# Altium PCB PCB1.PcbDoc
Units mm, origin at the board's own origin, x right, y up, seen from the top; angles counter-clockwise.
Board outline 95 x 95 mm, 2 copper layers (Top Layer, Bottom Layer); 46 components, 34 nets, 169 pads, 35 vias.
Unrouted connection lines stored in the file: 1.
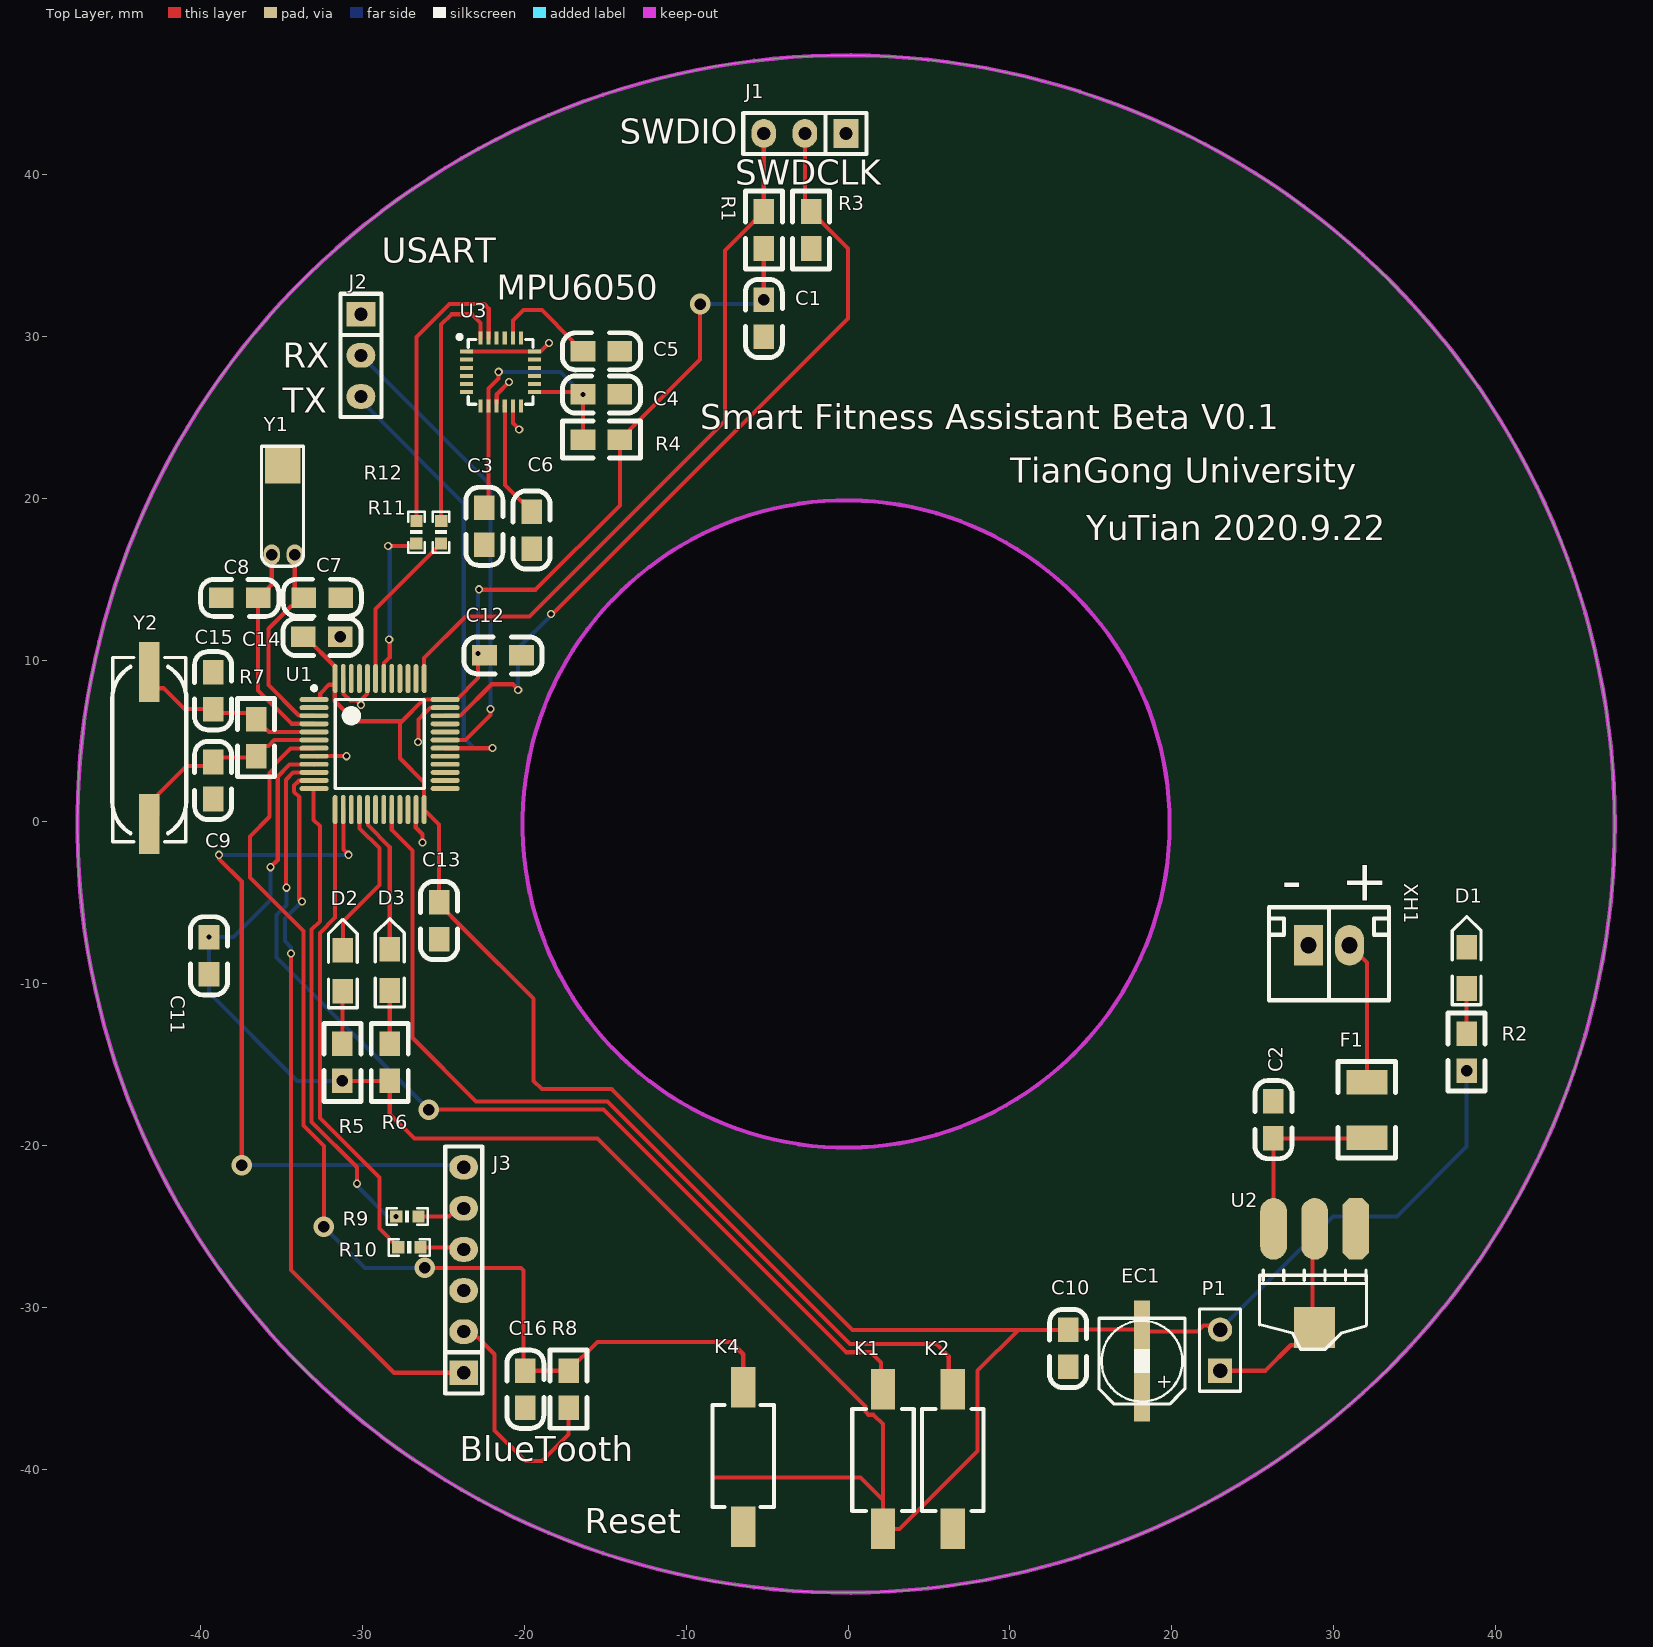
[diagram p0: Top Layer view]
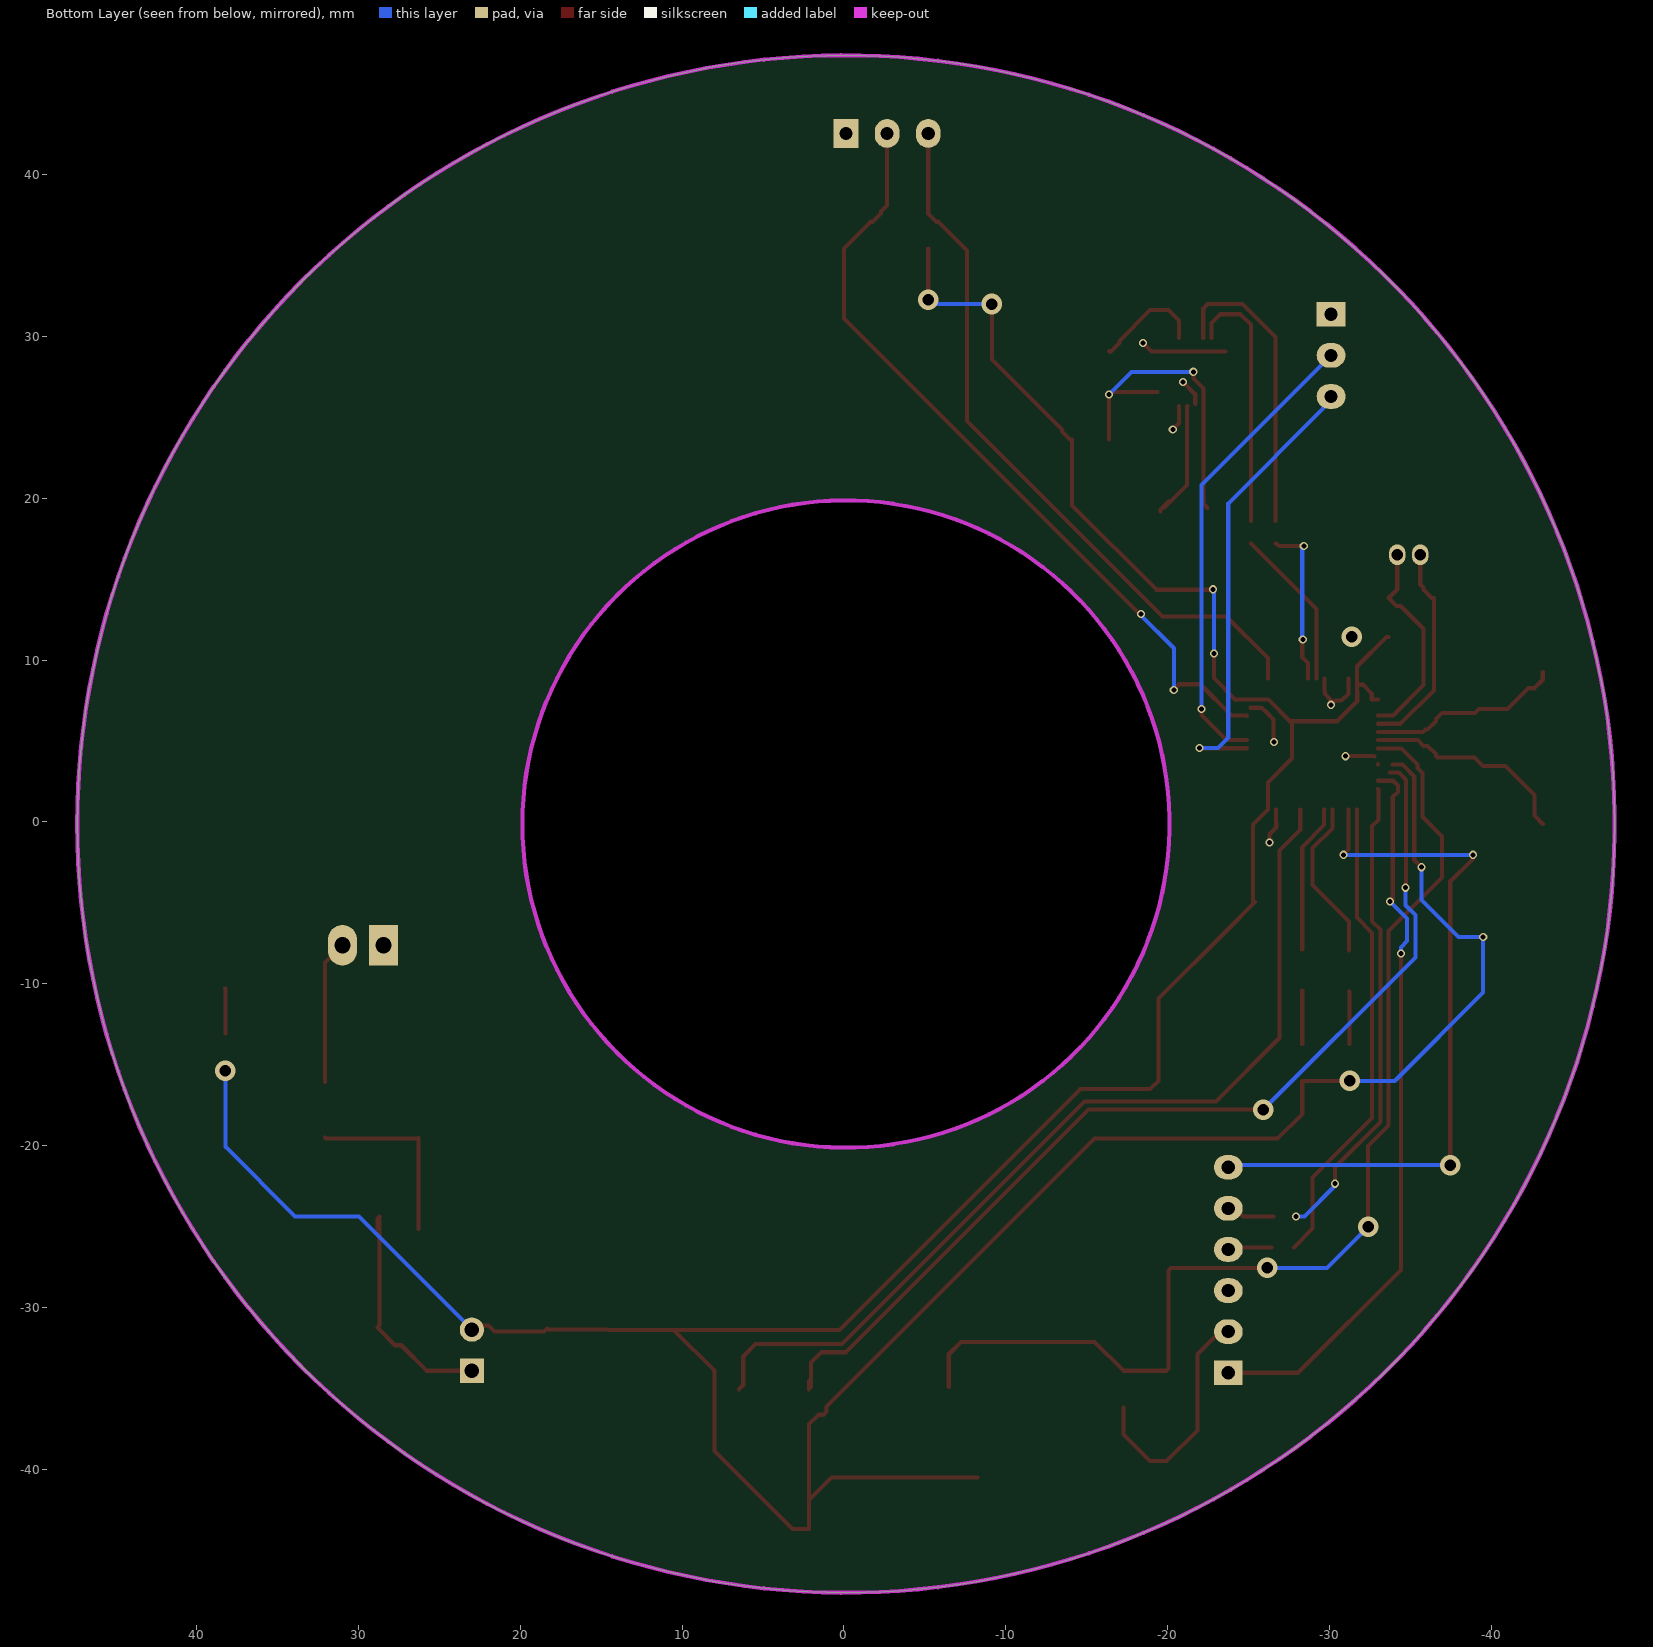
[diagram p1: Bottom Layer view, seen from below]
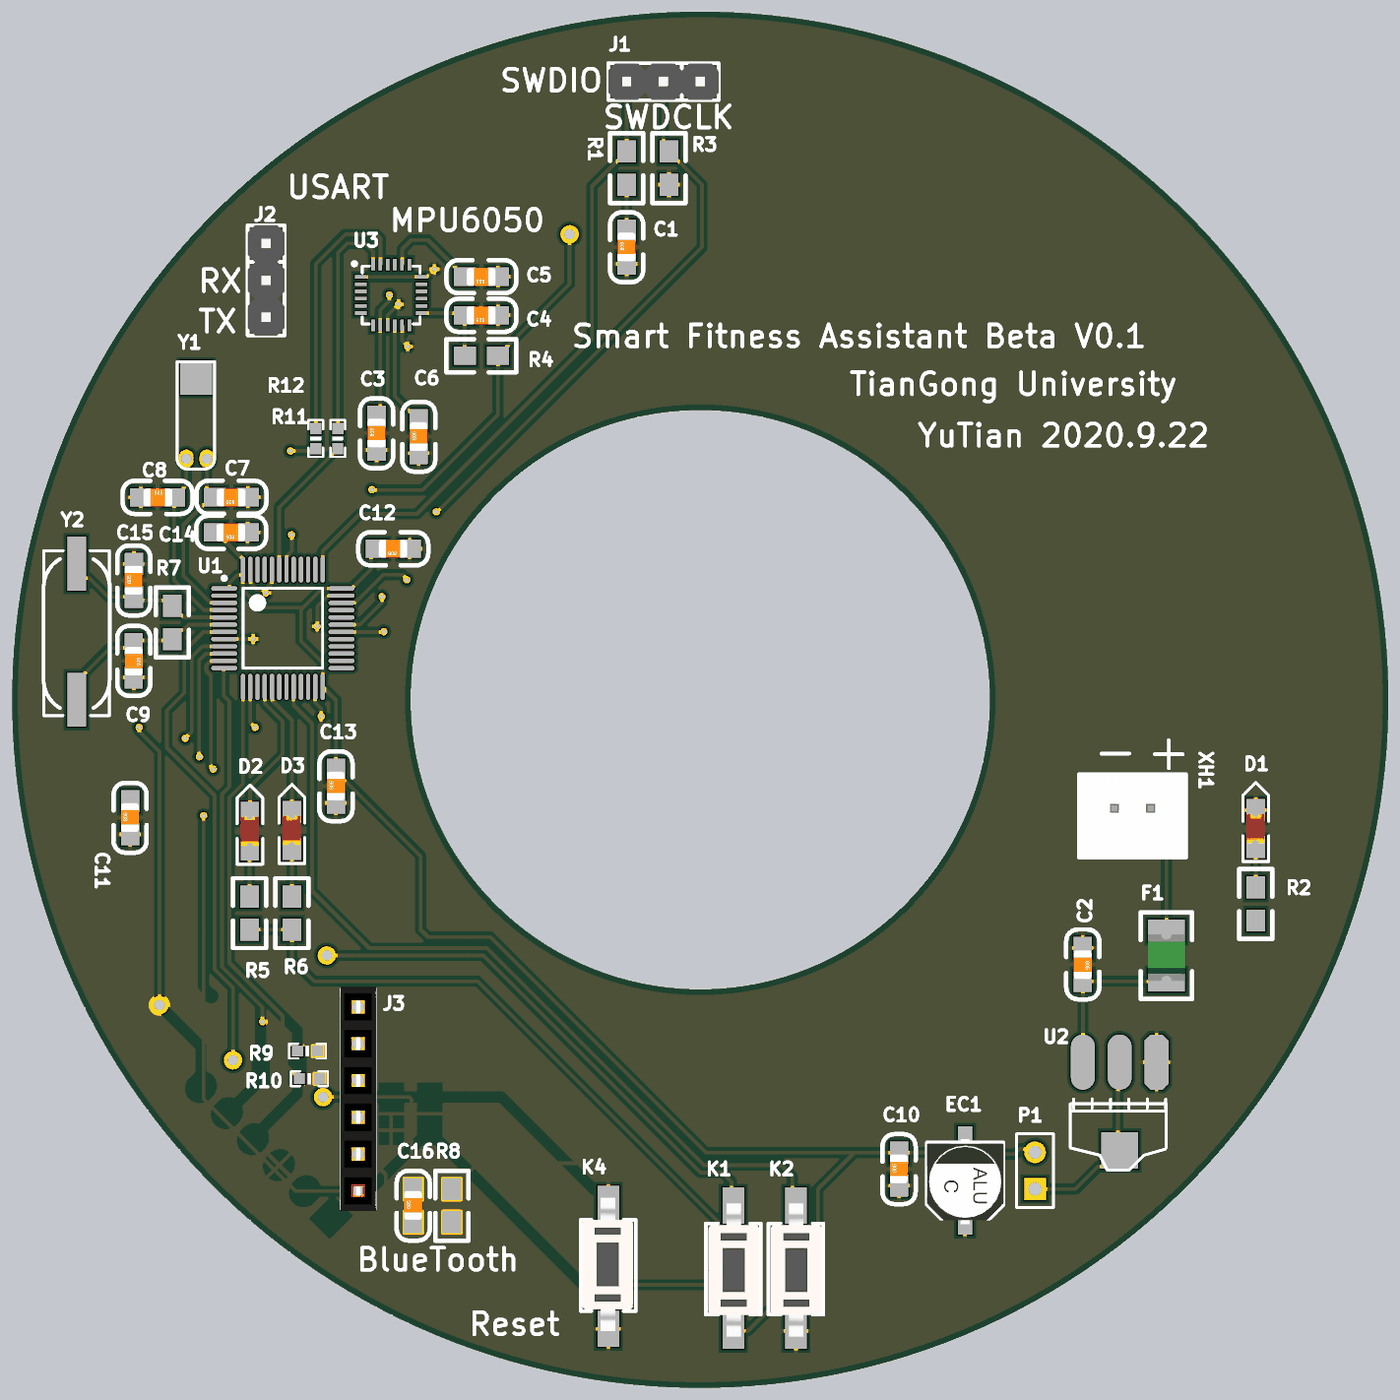
[diagram p2: 3D render of the assembled board from above, using the file's embedded part models]

## Layer stack, top to bottom
Top Solder: solder mask 0.0102, Solder Resist, Dk 3.5
Top Layer: signal copper 0.0356
Dielectric 1: dielectric 0.32, FR-4, Dk 4.8
Bottom Layer: signal copper 0.0356
Bottom Solder: solder mask 0.0102, Solder Resist, Dk 3.5

## Board outline
-47.627,-0.127 ccw(c-0.127,-0.127) -0.127,-47.627 ccw(c-0.127,-0.127) 47.373,-0.127 ccw(c-0.127,-0.127) -0.127,47.373 ccw(c-0.127,-0.127)
cut-out: -20.127,-0.127 ccw(c-0.127,-0.127) -0.127,-20.127 ccw(c-0.127,-0.127) 19.873,-0.127 ccw(c-0.127,-0.127) -0.127,19.873 ccw(c-0.127,-0.127)

## Design rules (kind name [scope] priority, off if disabled: settings)
Clearance [All] p1: gap=0.254 ignorepadtopadclearanceinfootprint=TRUE except(0: Arc-Hole Track-Hole SMDPad-Hole THPad-Hole Via-Hole Fill-Hole Poly-Hole Region-Hole Text-Hole; 0.203: Arc-SMDPad Track-SMDPad)
DiffPairsRouting [All] p1: maxlimit=0.254 minlimit=0.254 mostfreqgap=0.254 toplayer_minwidth=0.203 toplayer_maxwidth=0.381 toplayer_prefwidth=0.203 bottomlayer_minwidth=0.203 bottomlayer_maxwidth=0.381 bottomlayer_prefwidth=0.203 maxuncoupledlength=12.7
PolygonConnect [All] p1: connectstyle=Relief reliefconductorwidth=0.254 reliefentries=4 polygonreliefangle="90 Angle" airgapwidth=0.254
RoutingVias [All] p1: holewidth=0.305 width=0.508 viastyle="Through Hole" minholewidth=0.203 minwidth=0.508 maxholewidth=0.508 maxwidth=1.27
SolderMaskExpansion [All] p1: expansion=0.102 istentingtop=FALSE
Width [All] p1: maxlimit=0.254 minlimit=0.178 preferedwidth=0.203
29 further rules are at their usual default settings.

## Components (designator, comment, footprint, x,y, rotation, side; value= is the part's Value field where it differs from the comment)
C1 "104" 0805C -5.217,29.99 r90 top
C2 "104" 0805C 26.289,-17.272 r270 top
C3 "10u" 0805C -22.479,17.145 r90 top
C4 "104" 0805C -14.115,26.406 r180 top
C5 "10u" 0805C -14.115,29.073 r180 top
C6 "104" 0805C -19.568,16.909 r90 top
C7 "10P" 0805C -31.369,13.843 r180 top
C8 "10P" 0805C -38.717,13.853 r0 top
C9 "22P" 0805C -39.226,3.683 r270 top
C10 "104" 0805C 13.589,-33.655 r90 top
C11 "104" 0805C -39.497,-9.398 r90 top
C12 "104" 0805C -20.193,10.287 r180 top
C13 "104" 0805C -25.283,-7.221 r90 top
C14 "104" 0805C -31.387,11.42 r180 top
C15 "22P" 0805C -39.243,6.985 r90 top
C16 "104" 0805C -19.949,-36.177 r90 top
D1 "LED" LED-0805R 38.227,-10.287 r90 top
D2 "LED" LED-0805R -31.214,-10.467 r90 top
D3 "LED" LED-0805R -28.321,-10.414 r90 top
EC1 "220u" SMD-EC5.0X5.3X5.4 18.161,-35.56 r90 top
F1 "0.75A" FUSE-1210 32.004,-16.129 r270 top
J1 "SWD Port" "Pin HDR1X3/2.54mm-S" -0.127,42.545 r270 top
J2 "USART_PORT" "Pin HDR1X3/2.54mm-S" -30.099,31.369 r0 top
J3 "HC-06 Interface" Fe-HDR1X6/2.54-S -23.749,-34.036 r90 top
K1 "KEY" SMD-3X6X4.3 2.159,-43.688 r90 top
K2 "KEY" SMD-3X6X4.3 6.477,-43.688 r90 top
K4 "KEY" SMD-3X6X4.3 -6.477,-34.925 r270 top
P1 "Header 2" HDR1X2 22.987,-33.909 r90 top
R1 "10K" 0805 -5.205,37.719 r270 top
R2 "510R" 0805 38.227,-13.081 r270 top
R3 "10K" 0805 -2.288,35.433 r90 top
R4 "10R" 0805 -16.383,23.624 r0 top
R5 "510R" 0805 -31.24,-13.716 r270 top
R6 "510R" 0805 -28.319,-13.716 r270 top
R7 "1M" 0805 -36.576,6.35 r270 top
R8 "10K" 0805 -17.27,-33.909 r270 top
R9 "0R" 0603P -27.241,-24.382 r0 top
R10 "0R" 0603P -27.114,-26.287 r0 top
R11 "0R" 0603P -26.67,17.907 r270 top
R12 "0R" 0603P -25.146,17.907 r270 top
U1 "STM32F103C8T6" STM-LQFP48_N -28.944,4.812 r0 top
U2 "AMS1117" AMS1117 31.37,-25.148 r180 top
U3 "MPU6050" QFN24 -21.463,27.813 r0 top
XH1 "XH2" XH2/2.54mm/180 28.448,-7.62 r0 top
Y1 "XATL32" XTAL32 -35.611,16.51 r90 top
Y2 "8M" 49S_SMD -43.18,9.271 r270 top

## Footprints (in the part's own frame and the unit in brackets; to place one, negate y for a bottom-side part, rotate by r counter-clockwise, add the part's x,y. Pads: shape width x height; smd on the part's side, far side on the other; paste and mask are expansions set on the pad)
49S_SMD [mil]
  rect 146x51 smd: 1(0,0) 2(370,0)
  silkscreen extent -35,-90 413,90
0603P [mil]
  rect 30x30 smd: 1(-27,0) 2(27.5,-0.06)
  silkscreen extent -50,-20 50,20
0805 [mil]
  rect 60x50 smd: 1(0,-0.06) 2(90,-0.06)
  silkscreen extent -50,-45 140,45
0805C [mil]
  rect 60x50 smd: 1(-0.71,-0.4) 2(89.29,-0.4)
  silkscreen extent -51,-45 139,45, body extent 6,-25 84,25, height 31
AMS1117 [mil]
  oct 65x150 smd: 1(0.03,-0.06)
  oval 65x150 smd: 2(100.03,-0.06) 3(200.03,-0.06)
  rect 100x100 smd: 4(100.03,239.94)
  silkscreen extent -26,100 234,293
Fe-HDR1X6/2.54-S [mil]
  rect 60x70 hole 32: 1(0,0)
  oval 60x70 hole 32: 2(100,0) 3(200,0) 4(300,0) 5(400,0) 6(500,0)
  silkscreen extent -50,-45 550,45, body extent -55,-49 555,49, height 109
FUSE-1210 [mil]
  rect 60x100 smd: 1(-2,2) 2(133,2)
  silkscreen extent -52,-68 183,72, body extent 8,-49 134,53, height 27
HDR1X2 [mm]
  rect 1.5x1.5 hole 0.9: 1(0,0)
  round 1.5 hole 0.9: 2(2.54,0)
  silkscreen extent -1.27,-1.27 3.81,1.27
LED-0805R [mil]
  rect 60x50 smd: A(0,0) K(100,0)
  silkscreen extent -40,-35 175,35, body extent 11,-24 89,25, height 32
"Pin HDR1X3/2.54mm-S" [mil]
  rect 70x60 hole 32: 1(0,0)
  oval 70x60 hole 32: 2(0,-100) 3(0,-200)
  silkscreen extent -50,-250 50,50, body extent -50,-250 50,50, height 336
QFN24 [mm]
  rect 0.8x0.25 smd: 1(-2.101,1.25) 2(-2.101,0.75) 3(-2.101,0.25) 4(-2.101,-0.25) 5(-2.101,-0.75) 6(-2.101,-1.25) 13(2.101,-1.25) 14(2.101,-0.75) 15(2.101,-0.25) 16(2.101,0.25) 17(2.101,0.75) 18(2.101,1.25)
  rect 0.25x0.8 smd: 7(-1.25,-2.101) 8(-0.75,-2.101) 9(-0.25,-2.101) 10(0.25,-2.101) 11(0.75,-2.101) 12(1.25,-2.101) 19(1.25,2.101) 20(0.75,2.101) 21(0.25,2.101) 22(-0.25,2.101) 23(-0.75,2.101) 24(-1.25,2.101)
  silkscreen extent -2.66,-2 2,2.28
SMD-3X6X4.3 [mm]
  rect 2.5x1.5 smd: 1(0,0) 3(8.636,0)
  silkscreen extent 1.11,-1.9 7.41,1.9, body extent -0.41,-1.78 8.79,1.72, height 4.4
SMD-EC5.0X5.3X5.4 [mm]
  rect 3x1 smd: 1(0,0) 2(4.477,0)
  silkscreen extent -0.41,-2.65 4.89,2.66, body extent -0.79,-2.65 5.11,2.65, height 5.41
STM-LQFP48_N [mm] "QFP, 48-Leads, Body 7x7mm, Pitch 0.5mm, IPC Medium Density"
  oval 1.8x0.3 smd: 1(-4.05,2.75) 2(-4.05,2.25) 3(-4.05,1.75) 4(-4.05,1.25) 5(-4.05,0.75) 6(-4.05,0.25) 7(-4.05,-0.25) 8(-4.05,-0.75) 9(-4.05,-1.25) 10(-4.05,-1.75) 11(-4.05,-2.25) 12(-4.05,-2.75) 25(4.05,-2.75) 26(4.05,-2.25) 27(4.05,-1.75) 28(4.05,-1.25) 29(4.05,-0.75) 30(4.05,-0.25) 31(4.05,0.25) 32(4.05,0.75) 33(4.05,1.25) 34(4.05,1.75) 35(4.05,2.25) 36(4.05,2.75)
  oval 0.3x1.8 smd: 13(-2.75,-4.05) 14(-2.25,-4.05) 15(-1.75,-4.05) 16(-1.25,-4.05) 17(-0.75,-4.05) 18(-0.25,-4.05) 19(0.25,-4.05) 20(0.75,-4.05) 21(1.25,-4.05) 22(1.75,-4.05) 23(2.25,-4.05) 24(2.75,-4.05) 37(2.75,4.05) 38(2.25,4.05) 39(1.75,4.05) 40(1.25,4.05) 41(0.75,4.05) 42(0.25,4.05) 43(-0.25,4.05) 44(-0.75,4.05) 45(-1.25,4.05) 46(-1.75,4.05) 47(-2.25,4.05) 48(-2.75,4.05)
  silkscreen extent -4.17,-2.75 2.75,3.57, body extent -3.5,-3.5 3.5,3.5, height 1.6
XH2/2.54mm/180 [mm]
  rect 1.8x2.5 hole 1: 1(0,0)
  oval 1.8x2.5 hole 1: 2(2.54,0)
  silkscreen extent -2.43,-3.4 4.97,2.35, body extent -2.43,-3.4 4.97,2.35, height 7
XTAL32 [mil]
  oval 50x40 hole 28: 1(0,0) 2(0,-56)
  rect 92.13x86 smd: ""(220,-27)
  silkscreen extent -28,-77 264,25

## Part data
C1 C2 C3 C4 C5 C6 C7 C8 C9 C10 C11 C12 C13 C14 C15 C16: library part CAP, "无极性电容"
EC1: library part SMD_ECAP, "贴片电解电容"
F1: library part FUSE
J1 J2: library part "Pin HDR1X3"
J3: library part "Female HDR1X6"
P1: "Header, 2-Pin"
R1 R2 R3 R4 R5 R6 R7 R8 R9 R10 R11 R12: library part R
U1: "ARM Cortex-M3 32-bit MCU, 64 KB Flash, 20 KB Internal RAM, 37 I/Os, 48-pin LQFP, -40 to 85 degC, Tray", I/Os (High Current)=37, Operating Frequency(F) (Processor speed) (MHz)=72, Supplier Part Number 1=497-6063-ND, Supply Voltage(Vcc) min (V)=2, A/D Converter="2x12-bit (10 Channel)", ComponentLink1Description="Manufacturer URL", ComponentLink1URL=http://www.st.com/web/en/home.html, ComponentLink2Description=Datasheet, ComponentLink2URL=http://www.st.com/st-web-ui/static/active/en/resource/technical/document/datasheet/CD00161566.pdf, ComponentLink3Description="Package Specification", ComponentLink3URL=http://www.st.com/st-web-ui/static/active/en/resource/technical/document/datasheet/DM00058181.pdf, Core="ARM Cortex-M3", DatasheetVersion="Rev. 16", FLASH Size (Prog) (kB)=64, Internal RAM Size (kB)=20, Mounting Technology="Surface Mount", PackageDescription="48-Pin Low Profile Quad Flat Package, 7 x 7 mm Body, 0.5 mm Pitch", PackageReference=LQFP48, PackageVersion="Rev. 6, 06/2013", Packing=Tray, PartNumber=STM32F103C8T6, Supplier 1=Digi-Key, Supplier 2=Farnell, Supplier 3=Newark, Supplier 4=Newark, Supplier 5=Mouser, Supplier Part Number 2=1447637, Supplier Part Number 3=59M2182, Supplier Part Number 4=57P1222, Supplier Part Number 5=511-STM32F103C8T6
U3: "9轴运动处理传感器"
Y1: library part XTAL_1, "Crystal Oscillator"
Y2: library part XTAL, "Crystal Oscillator"

## Via types
v1: diameter 0.508, hole 0.305, Top Layer to Bottom Layer, 26 vias
v2: diameter 1.27, hole 0.711, Top Layer to Bottom Layer, 9 vias

## Nets (pads, with @x,y where several pads share a name; then routed paths per layer and width w, separated by ;. In a path a pad name is that pad's centre, name@x,y a point inside that pad or via, vN(x,y) a via of type N, cw(c..) or ccw(c..) an arc to the next point about the centre after c; other vN are vias at no path point)
3V3: C1.2 C10.2 C11.2 C12.2 C13.2 C14.2 EC1.2 J3.2 K1.1 P1.2 R1.2 R2.2 R4.2 R5.2 R6.2 R8.2 U1.1 U1.9 U1.24 U1.36 U1.48 | length 276
  Top Layer w0.254: v1(-35.687,-2.794) -35.687,-2.79 -35.24,-2.343 -35.24,2.816 -34.506,3.55 -34.423,3.55 -34.412,3.561 -33.904,3.561 ; C14.2 -33.528,11.43 -31.719,9.621 -31.715,9.621 -31.694,9.6 U1.48 -31.694,8.501 U1.48@-31.715,8.48 ; U1.9@-33.003,3.553 U1.9 ; U1.1 -32.633,7.562 -32.612,7.583 -32.612,7.944 -32.076,8.48 U1.48@-31.715,8.48 ; v2(-31.242,-16.002) R6.2 -28.321,-18.034 -26.797,-19.558 -15.494,-19.558 1.079,-36.131 1.079,-36.439 1.272,-36.632 1.58,-36.632 2.159,-37.211 2.159,-41.91 ; J3.2 -23.278,-31.496 -22.915,-31.86 -22.877,-31.86 -21.844,-32.893 -21.844,-37.592 -19.939,-39.497 -18.923,-39.497 -17.272,-37.846 R8.2 ; v1(-22.86,10.414) -22.86,8.89 -24.208,7.542 -24.236,7.57 -25.657,7.57 -25.665,7.562 -26.22,7.562 -27.559,6.223 ; v1@-22.733,14.351 -19.304,14.351 -14.097,19.558 R4.2 -13.97,23.622 -13.462,24.13 -13.462,24.257 -9.144,28.575 v2(-9.144,32.004) ; -8.255,-40.513 0.762,-40.513 2.159,-41.91 ; C1.2@-5.588,31.877 v2(-5.207,32.258) R1.2 ; P1.2 22.749,-31.131 22.231,-31.131 22.215,-31.115 21.971,-31.115 21.59,-31.496 18.534,-31.496 18.347,-31.309 18.288,-31.369 14.605,-31.369 14.587,-31.387 C10.2 10.523,-31.387 ; U1.48@-31.715,8.48 -31.703,8.467 -31.703,8.071 -31.715,8.058 -31.715,7.458 -30.48,6.223 -27.559,6.223 ; -27.559,6.223 -27.686,6.096 -27.686,3.937 -26.194,2.445 U1.24 -25.273,-0.159 C13.2 -25.4,-4.953 -23.622,-6.731 -19.431,-10.922 -19.431,-16.002 -18.923,-16.51 -14.605,-16.51 0.272,-31.387 10.523,-31.387 ; 2.159,-41.91 K1.1 3.175,-43.688 8.001,-38.862 8.001,-33.909 10.523,-31.387
  Bottom Layer w0.254: v1(-35.687,-2.794) -35.687,-4.826 -37.973,-7.112 v1(-39.497,-7.112) -39.497,-10.541 -34.036,-16.002 v2(-31.242,-16.002) ; v1(-22.86,10.414) -22.86,14.243 -22.796,14.307 v1(-22.796,14.376) ; v2(-9.144,32.004) -5.736,32.004 -5.482,32.258 v2(-5.207,32.258) ; P1.2 29.972,-24.384 33.909,-24.384 38.225,-20.068 v2(38.225,-15.367)
BL_KEY: J3.1 U1.11 | length 45.2
  Top Layer w0.254: v1(-34.417,-8.128) -34.417,-27.686 -28.067,-34.036 J3.1 ; v1@-33.909,-4.826 -33.909,1.548 -34.224,1.863 -34.224,2.261 -33.943,2.542 -33.796,2.542 -33.793,2.545 -33.019,2.545 U1.11@-32.994,2.57
  Bottom Layer w0.254: v1(-34.417,-8.128) -34.417,-7.747 -34.798,-7.366 -34.798,-5.962 v1(-33.749,-4.914)
BT_RXD: J3.5 R9.2 | length 3
  Top Layer w0.254: R9.2 -24.66,-24.384 -24.152,-23.876 J3.5
BT_STATE: J3.6 U1.14 | length 44.6
  Top Layer w0.254: v1(-38.862,-2.032) -38.862,-2.286 -37.465,-3.683 v2(-37.465,-21.209) ; U1.14@-31.186,0.762 -31.186,-1.707 v1(-30.861,-2.032)
  Bottom Layer w0.254: v1(-38.862,-2.032) -38.862,-2.101 -38.793,-2.032 v1(-30.861,-2.032) ; v2(-37.465,-21.209) -23.876,-21.209 J3.6
BT_TXD: J3.4 R10.2 | length 2.7
  Top Layer w0.254: R10.2 -23.876,-26.289 J3.4
GND: C1.1 C2.1 C3.1 C4.1 C5.1 C6.1 C7.1 C8.1 C9.2 C10.1 C11.1 C12.1 C13.1 C14.1 C15.2 C16.1 D1.K EC1.1 J1.1 J2.1 J3.3 K2.1 K4.3 R3.1 U1.8 U1.23 U1.35 U1.44 U1.47 U2.1 U3.1 U3.9 U3.11 U3.18 XH1.1 | length 19.8
  Top Layer w0.254: U1.8@-32.779,4.042 -32.758,4.064 v1(-30.988,4.064) ; U1.47@-31.185,8.861 -31.185,8.071 -31.174,8.06 -31.174,7.913 -30.754,7.493 -30.375,7.493 -30.121,7.239 v1(-30.099,7.239) -30.05,7.288 -30.05,7.576 -29.714,7.913 -29.714,8.06 -29.703,8.071 U1.44@-29.703,8.861 ; U1.23@-26.703,0.761 -26.703,-0.029 -26.714,-0.04 -26.714,-0.337 -26.289,-0.762 v1(-26.289,-1.27) ; v1(-26.575,4.943) -26.543,4.975 -26.543,6.342 -26.124,6.761 -25.843,7.042 -25.696,7.042 -25.685,7.053 -25.121,7.053 U1.35@-25.112,7.062 ; U3.1 U3.18 -19.36,29.065 -19.012,29.065 -18.486,29.591 v1(-18.477,29.591) ; U3.9@-21.705,25.838 -21.705,26.428 v1(-20.955,27.178) ; U3.11@-20.701,25.712 -20.701,24.638 v1(-20.32,24.257)
  other v2: -31.369,11.43
KEY0: K2.3 U1.20 | length 58.1
  Top Layer w0.254: U1.20 -28.194,-0.508 -26.924,-1.778 -26.924,-13.335 -22.987,-17.272 -14.859,-17.272 0.127,-32.258 5.461,-32.258 6.223,-33.02 6.223,-34.798 K2.3
LED0: D2.K U1.16 | length 10.1
  Top Layer w0.254: D2.K -31.214,-6.152 -28.956,-3.893 -28.956,-1.624 -30.182,-0.397 -30.182,-0.032 -30.185,-0.029 -30.185,-0.009 -30.194,0 U1.16
LED1: D3.K U1.17 | length 9.2
  Top Layer w0.254: U1.17@-29.686,0.762 -29.674,0.75 -29.674,-0.187 -28.321,-1.54 D3.K
NetC2_2: C2.2 F1.2 U2.3 | length 11.4
  Top Layer w0.254: C2.2 C2.2@26.289,-19.55 ; U2.3 C2.2@26.289,-19.55 ; F1.2 32.004,-19.558 26.297,-19.558 C2.2@26.289,-19.55
NetC3_2: C3.2 C4.2 R4.1 U3.8 U3.13 | length 20.4
  Top Layer w0.254: C3.2 -22.213,19.669 U3.8 -22.213,26.785 -21.59,27.408 v1(-21.59,27.813) ; U3.13 -16.53,26.563 v1(-16.383,26.416) R4.1
  Bottom Layer w0.254: v1(-21.59,27.813) -17.78,27.813 v1(-16.383,26.416)
NetC5_2: C5.2 U3.20 | length 6.8
  Top Layer w0.254: U3.20 -20.711,29.916 -20.711,30.264 -20.701,30.274 -20.701,30.988 -20.066,31.623 -18.923,31.623 -17.018,29.718 -17.018,29.591 -16.51,29.083 C5.2
NetC6_2: C6.2 U3.10 | length 7.8
  Top Layer w0.254: U3.10 -21.213,25.658 -21.209,25.654 -21.209,20.828 -19.812,19.431 C6.2@-19.685,19.431 ; C6.2@-20.066,19.812 -19.558,19.304 C6.2
NetC7_2: C7.2 U1.3 Y1.2 | length 13
  Top Layer w0.254: Y1.2 -34.188,14.361 -33.68,13.853 C7.2@-33.645,13.853 ; C7.2 -34.145,13.345 -34.407,13.345 -35.814,11.938 -35.814,8.453 -33.943,6.582 -33.796,6.582 -33.793,6.578 U1.3@-32.995,6.578
NetC8_2: C8.2 U1.4 Y1.1 | length 13.1
  Top Layer w0.254: Y1.1 -35.611,14.681 -35.814,14.478 -35.814,14.351 -36.322,13.843 C8.2 -36.449,8.128 -34.391,6.07 U1.4@-32.994,6.07
NetC9_1: C9.1 R7.2 U1.6 Y2.2 | length 13.2
  Top Layer w0.254: Y2.2 -42.659,0.394 -42.659,1.664 -40.866,3.457 -39.48,3.457 -38.963,3.974 -36.667,3.974 R7.2 -36.578,4.191 -36.07,4.699 -35.814,4.699 -35.459,5.054 U1.6@-32.994,5.054
NetC15_1: C15.1 R7.1 U1.5 Y2.1 | length 12.1
  Top Layer w0.254: Y2.1 -43.18,8.785 -42.659,8.264 -42.3,8.264 -41.003,6.967 C15.1 -38.997,6.731 -36.959,6.731 R7.1 -36.578,6.223 -36.07,5.715 -35.943,5.715 -35.79,5.562 U1.5
NetD1_A: D1.A R2.1 | length 2.8
  Top Layer w0.254: R2.1 38.225,-10.289 D1.A
NetD2_A: D2.A R5.1 | length 3.3
  Top Layer w0.254: R5.1 -31.242,-10.495 D2.A
NetD3_A: D3.A R6.1 | length 3.3
  Top Layer w0.254: R6.1 D3.A
NetF1_1: F1.1 XH1.2 | length 8.9
  Top Layer w0.254: XH1.2 32.055,-8.687 F1.1
NetP1_1: P1.1 U2.2 U2.4 | length 14.7
  Top Layer w0.254: P1.1 25.781,-33.909 27.353,-32.337 27.734,-32.337 U2.4 28.702,-31.115 28.702,-24.384 28.829,-24.511 U2.2
NetR9_1: R9.1 U1.12 | length 29.3
  Top Layer w0.254: U1.12@-32.994,2.037 -33.02,2.011 -33.02,0.127 -32.639,-0.254 -32.639,-6.14 -33.147,-6.648 -33.147,-18.542 -30.353,-21.336 v1@-30.353,-22.479
  Bottom Layer w0.254: v1@-30.353,-22.479 -28.448,-24.384 v1(-27.928,-24.384)
  other v1: -30.341,-22.352
NetR10_1: R10.1 U1.13 | length 29.4
  Top Layer w0.254: U1.13 -31.694,-5.913 -32.639,-6.858 -32.639,-18.288 -28.956,-21.971 -28.956,-25.132 R10.1
NetR11_2: R11.2 U1.42 | length 10.2
  Top Layer w0.254: U1.42@-28.685,8.863 -28.685,9.653 -28.674,9.664 -28.674,9.811 -28.321,10.164 -28.321,11.234 v1(-28.353,11.266) ; v1(-28.416,17.05) -26.892,17.05 -26.733,17.209 R11.2
  Bottom Layer w0.254: v1(-28.416,17.05) -28.416,16.981 -28.321,16.886 -28.321,11.298 v1(-28.353,11.266)
NetR12_2: R12.2 U1.43 | length 10
  Top Layer w0.254: U1.43 -29.194,13.162 R12.2
RESET: C16.2 K4.1 R8.1 U1.7 | length 70.2
  Top Layer w0.254: U1.7@-32.994,4.546 -34.443,4.546 -35.433,3.556 -35.433,3.342 -35.748,3.027 -35.748,0.32 -36.957,-0.889 -36.957,-3.429 -33.655,-6.731 -33.655,-18.752 -32.385,-20.022 v2(-32.385,-25.019) ; v2(-26.162,-27.559) -20.215,-27.559 -20.066,-27.708 -20.066,-33.782 C16.2 R8.1 -15.494,-32.131 -7.239,-32.131 -6.477,-32.893 K4.1
  Bottom Layer w0.254: v2(-32.385,-25.019) -29.845,-27.559 v2(-26.162,-27.559)
SCL: R11.1 U3.23 | length 18.6
  Top Layer w0.254: R11.1 -26.67,29.972 -24.638,32.004 -22.479,32.004 -22.205,31.73 U3.23@-22.205,29.914
SDA: R12.1 U3.24 | length 16
  Top Layer w0.254: R12.1 -25.146,30.734 -24.511,31.369 -23.241,31.369 -22.713,30.841 U3.24
SWCLK: J1.2 R3.2 U1.34 | length 49.4
  Top Layer w0.254: U1.34 -24.885,6.571 -24.103,6.571 -24.092,6.582 -23.945,6.582 -22.018,8.509 -20.701,8.509 v1@-20.447,8.255 ; v1@-18.288,12.827 0,31.115 0,35.433 -1.651,37.084 -1.778,37.084 -2.286,37.592 R3.2 -2.667,38.1 J1.2
  Bottom Layer w0.254: v1(-20.383,8.153) -20.383,10.732 v1@-18.288,12.827
  other v1: -18.351,12.852
SWDIO: J1.3 R1.1 U1.37 | length 44.8
  Top Layer w0.254: U1.37 -26.194,10.128 -23.622,12.7 -19.685,12.7 -7.605,24.78 -7.605,35.321 -5.842,37.084 -5.715,37.084 -5.207,37.592 R1.1 J1.3
USART_RX: J2.2 U1.31 | length 29
  Top Layer w0.254: U1.31 -23.64,5.062 -22.098,6.604 v1(-22.098,6.985)
  Bottom Layer w0.254: J2.2 -22.098,20.828 v1(-22.098,6.985)
USART_TX: J2.3 U1.30 | length 28.7
  Top Layer w0.254: U1.30@-24.894,4.554 -21.989,4.554 v1(-21.971,4.572)
  Bottom Layer w0.254: J2.3 -30.099,26.035 -29.972,25.908 -29.935,25.908 -29.608,25.582 -29.608,25.544 -23.749,19.685 -23.749,5.207 -23.114,4.572 v1(-21.971,4.572)
WK_UP: K1.3 U1.10 | length 62.3
  Top Layer w0.254: v1(-34.703,-4.064) -34.732,-4.035 -34.732,2.606 -34.285,3.053 U1.10@-33.743,3.053 ; v2(-25.908,-17.78) -15.113,-17.78 -0.127,-32.766 1.397,-32.766 2.032,-33.401 2.032,-34.925 K1.3 K1.3@2.159,-34.552
  Bottom Layer w0.254: v1(-34.703,-4.064) -34.703,-5.149 -35.306,-5.752 -35.306,-8.382 v2(-25.908,-17.78)
pads on no net: U1.2 U1.15 U1.18 U1.19 U1.21 U1.22 U1.25 U1.26 U1.27 U1.28 U1.29 U1.32 U1.33 U1.38 U1.39 U1.40 U1.41 U1.45 U1.46 U3.2 U3.3 U3.4 U3.5 U3.6 U3.7 U3.12 U3.14 U3.15 U3.16 U3.17 U3.19 U3.21 U3.22 Y1.

## Polygon pours and split planes (outlines as drawn)
GND on Top Layer "Top Layer-No Net" (hatched Horizontal grid 0.108 track 0.203, shelved, pour order 5): -47.627,-0.127 ccw(c-0.127,-0.127) -0.127,-47.627 ccw(c-0.127,-0.127) 47.373,-0.127 ccw(c-0.127,-0.127) -0.127,47.373 ccw(c-0.127,-0.127)
GND on Bottom Layer "Top Layer-No Net1" (hatched Horizontal grid 0.108 track 0.203, shelved, pour order 6): -47.627,-0.127 ccw(c-0.127,-0.127) -0.127,-47.627 ccw(c-0.127,-0.127) 47.373,-0.127 ccw(c-0.127,-0.127) -0.127,47.373 ccw(c-0.127,-0.127)

## Keep-outs
Keep-Out Layer:
  circle w0.254: c-0.127,-0.127 r20
  circle w0.254: c-0.127,-0.127 r47.5

## Other copper
Top Layer:
  pour cut-out: -30.694,8.862

## Silkscreen, mask and mechanical layers (free items; w line width, h text height)
Top Overlay:
  pour cut-out: -31.801,7.65 -26.086,7.65 -26.086,2.06 -26.088,2.062 -31.801,2.062
  text "SWDIO" at -14.097,41.91 h1.52
  text "SWDCLK" at -6.985,39.37 h1.52
  text "USART" at -28.829,34.544 h1.52
  text "MPU6050" at -21.717,32.258 h1.52
  text "RX" at -34.925,28.067 h1.52
  text "TX" at -34.925,25.273 h1.52
  text "Smart Fitness Assistant Beta V0.1" at -9.144,24.257 h1.52
  text "TianGong University" at 10.033,20.955 h1.52
  text "YuTian 2020.9.22" at 14.732,17.399 h1.52
  text "-" at 26.797,-4.826 h2.54
  text "+" at 30.48,-4.868 h2.54
  text "BlueTooth" at -24.003,-39.497 h1.52
  text "Reset" at -16.256,-43.942 h1.52

## Text inside footprints (layer, text, board x,y; h text height)
EC1: Top Overlay "+" at 19.938,-35.115 h0.89 r90